# EAGLE board Relay_Cape (EAGLE 7.7.0)
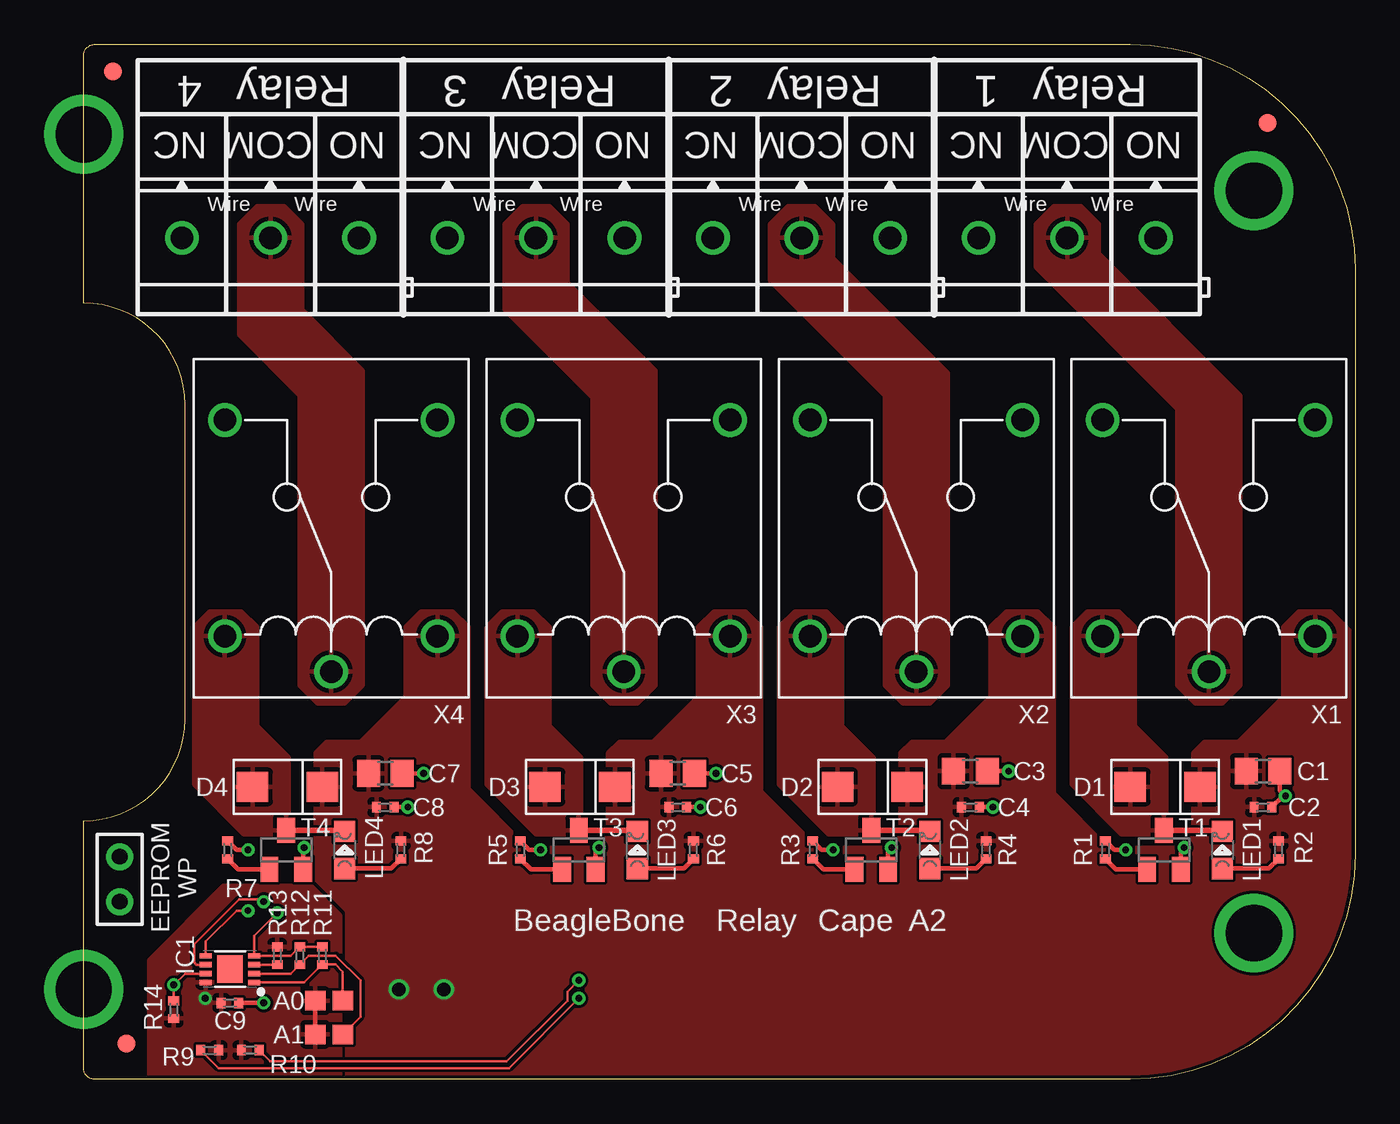
[diagram p0: board, top side]
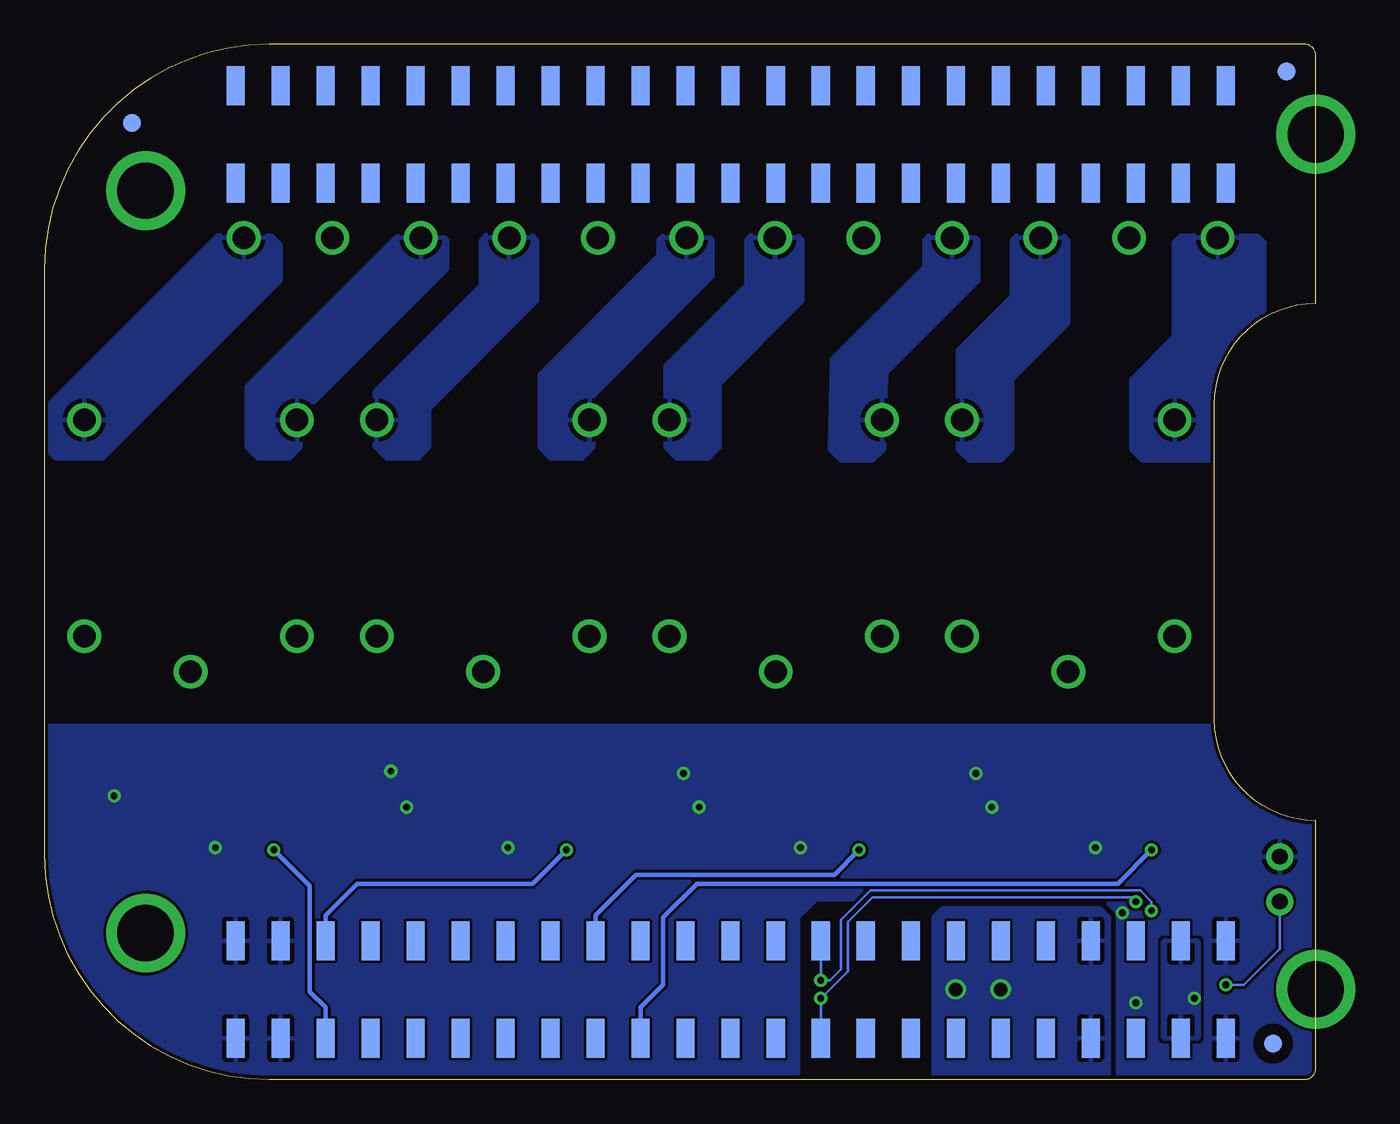
[diagram p1: board, bottom side, seen from below]

Size 71.75 x 58.42 mm. Coordinates in mm from the lower left corner, seen from the top.
Copper layers (1+16): Top 0.035mm / dielectric 1.5mm / Bottom 0.035mm
Design rules "SparkFun-2-layer *": minimum track width 6mil, minimum drill 15mil, track to track 6mil, track to pad 6mil, pad to pad 6mil, via to via 6mil, smd to smd 6mil, copper to edge 8mil, drill to drill 8mil, minimum pad ring 12mil, minimum via ring 7mil, stop-mask expansion 4mil, vias tented up to drill 32mil, thermal gap 10mil
tRestrict: 4 lines

## Footprints (pad centres in the part's own frame; a part is rotated, then mirrored left to right if it is on the bottom)
BEAGLEBONE.CAPE.BOTTOM-ONLY-PADS = smd 1.02 x 2.2 bottom: B8.1 5.08,50.59; B8.2 5.08,56.09; B8.3 7.62,50.59; B8.4 7.62,56.09; B8.5 10.16,50.59; B8.6 10.16,56.09; B8.7 12.7,50.59; B8.8 12.7,56.09; B8.9 15.24,50.59; B8.10 15.24,56.09; B8.11 17.78,50.59; B8.12 17.78,56.09; B8.13 20.32,50.59; B8.14 20.32,56.09; B8.15 22.86,50.59; B8.16 22.86,56.09; B8.17 25.4,50.59; B8.18 25.4,56.09; B8.19 27.94,50.59; B8.20 27.94,56.09; B8.21 30.48,50.59; B8.22 30.48,56.09; B8.23 33.02,50.59; B8.24 33.02,56.09; B8.25 35.56,50.59; B8.26 35.56,56.09; B8.27 38.1,50.59; B8.28 38.1,56.09; B8.29 40.64,50.59; B8.30 40.64,56.09; B8.31 43.18,50.59; B8.32 43.18,56.09; B8.33 45.72,50.59; B8.34 45.72,56.09; B8.35 48.26,50.59; B8.36 48.26,56.09; B8.37 50.8,50.59; B8.38 50.8,56.09; B8.39 53.34,50.59; B8.40 53.34,56.09; B8.41 55.88,50.59; B8.42 55.88,56.09; B8.43 58.42,50.59; B8.44 58.42,56.09; B8.45 60.96,50.59; B8.46 60.96,56.09; B9.1 5.08,2.33; B9.2 5.08,7.83; B9.3 7.62,2.33; B9.4 7.62,7.83; B9.5 10.16,2.33; B9.6 10.16,7.83; B9.7 12.7,2.33; B9.8 12.7,7.83; B9.9 15.24,2.33; B9.10 15.24,7.83; B9.11 17.78,2.33; B9.12 17.78,7.83; B9.13 20.32,2.33; B9.14 20.32,7.83; B9.15 22.86,2.33; B9.16 22.86,7.83; B9.17 25.4,2.33; B9.18 25.4,7.83; B9.19 27.94,2.33; B9.20 27.94,7.83; B9.21 30.48,2.33; B9.22 30.48,7.83; B9.23 33.02,2.33; B9.24 33.02,7.83; B9.25 35.56,2.33; B9.26 35.56,7.83; B9.27 38.1,2.33; B9.28 38.1,7.83; B9.29 40.64,2.33; B9.30 40.64,7.83; B9.31 43.18,2.33; B9.32 43.18,7.83; B9.33 45.72,2.33; B9.34 45.72,7.83; B9.35 48.26,2.33; B9.36 48.26,7.83; B9.37 50.8,2.33; B9.38 50.8,7.83; B9.39 53.34,2.33; B9.40 53.34,7.83; B9.41 55.88,2.33; B9.42 55.88,7.83; B9.43 58.42,2.33; B9.44 58.42,7.83; B9.45 60.96,2.33; B9.46 60.96,7.83 | drill 3.175 pad 4.445: MH.1 0,5.08; MH.2 66.04,8.255; MH.3 66.04,50.165; MH.4 0,53.34
0805 = smd 1.3 x 1.5: 1 -0.95,0; 2 0.95,0
0402 = smd 0.5 x 0.6: 1 -0.5,0; 2 0.5,0
DIODE_SMA = smd 1.778 x 1.676: A -1.905,0; K 2.032,0
FIDUCIAL_40MIL = smd 1.016 x 1.016: P$1 0,0
UDFN8,2X3(ON-SEMI) = smd 0.3 x 0.68: 1 0.75,1.36; 2 0.25,1.36; 3 -0.25,1.36; 4 -0.75,1.36; 5 -0.75,-1.36; 6 -0.25,-1.36; 7 0.25,-1.36; 8 0.75,-1.36 | smd 1.56 x 1.45: P$1 0,0
JUMPER-(X2) = drill 0.889 pad 1.524: 1 -1.27,0; 2 1.27,0
0805-LED = smd 1.2 x 1.2: A 0,1.05; K 0,-1.05
SOLDER.JOINT(0603) = smd 1.15 x 1.1: 1 -0.775,0; 2 0.775,0
SOT23-BEC = smd 1 x 1.4: B -0.95,-1.1; C 0,1.1; E 0.95,-1.1
GOODSKY.RWH-SH-105D = drill 1.27: COM 0,8.1; NC 6,-6.1; NO -6,-6.1; V+ -6,6.1; V- 6,6.1
TERMINAL.BLOCK-3TERM-5MM.PITCH-(50MIL.HOLES) = drill 1.27 pad 1.778: 1 -5,0; 2 0,0; 3 5,0

## Placement (x,y rotation side)
BB.CAPE1  BEAGLEBONE.CAPE.BOTTOM-ONLY-PADS  [BEAGLEBONE.CAPE.BOTTOM-ONLY-PADS]  0,0 0 top
C1  10uF  [0805]  66.55,17.4 0 top
C2  .1uF  [0402]  66.55,15.37 0 top
C3  10uF  [0805]  50.04,17.4 0 top
C4  .1uF  [0402]  50.04,15.37 0 top
C5  10uF  [0805]  33.53,17.27 0 top
C6  .1uF  [0402]  33.53,15.37 0 top
C7  10uF  [0805]  17.02,17.27 0 top
C8  .1uF  [0402]  17.02,15.37 0 top
C9  .1uF  [0402]  8.26,4.32 0 top
D1  B260  [DIODE_SMA]  60.96,16.51 0 top
D2  B260  [DIODE_SMA]  44.45,16.51 0 top
D3  B260  [DIODE_SMA]  27.94,16.51 0 top
D4  B260  [DIODE_SMA]  11.43,16.51 0 top
FUD1  FIDUCIAL  [FIDUCIAL_40MIL]  2.41,2.03 0 top
FUD2  FIDUCIAL  [FIDUCIAL_40MIL]  66.8,53.98 0 top
FUD3  FIDUCIAL  [FIDUCIAL_40MIL]  1.65,56.9 0 top
FUD4  FIDUCIAL  [FIDUCIAL_40MIL]  2.41,2.03 0 bottom
FUD5  FIDUCIAL  [FIDUCIAL_40MIL]  66.8,53.98 0 bottom
FUD6  FIDUCIAL  [FIDUCIAL_40MIL]  1.65,56.9 0 bottom
IC1  [UDFN8,2X3(ON-SEMI)]  8.26,6.22 270 top
JMP1  JUMPER-(X2)  [JUMPER-(X2)]  2.03,11.3 90 top
LED1  GREEN  [0805-LED]  64.26,12.95 180 top
LED2  GREEN  [0805-LED]  47.75,12.95 180 top
LED3  GREEN  [0805-LED]  31.24,12.95 180 top
LED4  GREEN  [0805-LED]  14.73,12.95 180 top
R1  1k  [0402]  57.66,12.95 270 top
R2  1k  [0402]  67.44,12.95 90 top
R3  1k  [0402]  41.15,12.95 270 top
R4  1k  [0402]  50.93,12.95 90 top
R5  1k  [0402]  24.64,12.95 270 top
R6  1k  [0402]  34.42,12.95 90 top
R7  1k  [0402]  8.13,12.95 270 top
R8  1k  [0402]  17.91,12.95 90 top
R9  DNP(2.2k)  [0402]  7.11,1.65 0 top
R10  DNP(2.2k)  [0402]  9.4,1.65 180 top
R11  1k  [0402]  13.46,6.99 270 top
R12  1k  [0402]  12.19,6.99 270 top
R13  1k  [0402]  10.92,6.99 270 top
R14  1k  [0402]  5.08,3.94 270 top
SJ1  [SOLDER.JOINT(0603)]  13.84,4.45 0 top
SJ2  [SOLDER.JOINT(0603)]  13.84,2.54 0 top
T1  3904  [SOT23-BEC]  60.96,12.95 0 top
T2  3904  [SOT23-BEC]  44.45,12.95 0 top
T3  3904  [SOT23-BEC]  27.94,12.95 0 top
T4  3904  [SOT23-BEC]  11.43,12.95 0 top
X1  RELAY_SINGLE_POLE_DOUBLE_THROW  [GOODSKY.RWH-SH-105D]  63.5,31.11 180 top
X2  RELAY_SINGLE_POLE_DOUBLE_THROW  [GOODSKY.RWH-SH-105D]  46.99,31.11 180 top
X3  RELAY_SINGLE_POLE_DOUBLE_THROW  [GOODSKY.RWH-SH-105D]  30.48,31.11 180 top
X4  RELAY_SINGLE_POLE_DOUBLE_THROW  [GOODSKY.RWH-SH-105D]  13.97,31.11 180 top
X5  [TERMINAL.BLOCK-3TERM-5MM.PITCH-(50MIL.HOLES)]  55.5,47.5 0 top
X6  [TERMINAL.BLOCK-3TERM-5MM.PITCH-(50MIL.HOLES)]  40.51,47.5 0 top
X7  [TERMINAL.BLOCK-3TERM-5MM.PITCH-(50MIL.HOLES)]  25.53,47.5 0 top
X8  [TERMINAL.BLOCK-3TERM-5MM.PITCH-(50MIL.HOLES)]  10.54,47.5 0 top

## Library data of the parts
BB.CAPE1 = GHI-Solutions
C1-C9 LED1-LED4 R1-R14 = GHI-BasicComponents
D1-D4 FUD1-FUD6 = GHI
IC1 = GHI-IC
JMP1 = GHI-Headers
SJ1 SJ2 = GHI-Miscellaneous
T1-T4 = transistor
X1-X4 = GHI2
X5-X8 = GHI-Connectors

## Nets
+5V: BB.CAPE1.B9.7 BB.CAPE1.B9.8 C1.1 C2.1 C3.1 C4.1 C5.1 C6.1 C7.1 C8.1 D1.K D2.K D3.K D4.K R2.2 R4.2 R6.2 R8.2 X1.V+ X2.V+ X3.V+ X4.V+
A0: IC1.1 R11.2 SJ1.2
A1: IC1.2 R12.2 SJ2.2
A2: IC1.3 R13.2
GND: BB.CAPE1.B9.1 BB.CAPE1.B9.2 BB.CAPE1.B9.43 BB.CAPE1.B9.44 BB.CAPE1.B9.45 BB.CAPE1.B9.46 C1.2 C2.2 C3.2 C4.2 C5.2 C6.2 C7.2 C8.2 C9.2 IC1.4 JMP1.2 R11.1 R12.1 T1.E T2.E T3.E T4.E
LED1.A: LED4.A R8.1
LED2.A: LED3.A R6.1
LED3.A: LED2.A R4.1
LED4.A: LED1.A R2.1
RELAY1: BB.CAPE1.B9.41 R1.1
RELAY1.COM.GND: X1.COM X5.2
RELAY1.GND: D4.A LED4.K T4.C X4.V-
RELAY1.NC: X1.NC X5.1
RELAY1.NO: X1.NO X5.3
RELAY2: BB.CAPE1.B9.42 R3.1
RELAY2.COM.GND: X2.COM X6.2
RELAY2.GND: D3.A LED3.K T3.C X3.V-
RELAY2.NC: X2.NC X6.1
RELAY2.NO: X2.NO X6.3
RELAY3: BB.CAPE1.B9.30 R5.1
RELAY3.COM.GND: X3.COM X7.2
RELAY3.GND: D2.A LED2.K T2.C X2.V-
RELAY3.NC: X3.NC X7.1
RELAY3.NO: X3.NO X7.3
RELAY4: BB.CAPE1.B9.27 R7.1
RELAY4.COM.GND: X4.COM X8.2
RELAY4.GND: D1.A LED1.K T1.C X1.V-
RELAY4.NC: X4.NC X8.1
RELAY4.NO: X4.NO X8.3
SCL: BB.CAPE1.B9.19 IC1.6 R9.1
SDA: BB.CAPE1.B9.20 IC1.5 R10.1
T1.BASE: R7.2 T4.B
T2.BASE: R5.2 T3.B
T3.BASE: R3.2 T2.B
T4.BASE: R1.2 T1.B
VCC: BB.CAPE1.B9.3 BB.CAPE1.B9.4 C9.1 IC1.8 R9.2 R10.2 R13.1 R14.2 SJ1.1 SJ2.1
WP: IC1.7 JMP1.1 R14.1

## Tracks (layer width: path | path; a pad name or v marks a point on that pad's centre or on a via)
+5V  (via drill 0.76 pad 0.18)
  other vias: 20.32,5.08 17.78,5.08
  pour Bottom: 11.68,9.14 11.68,0 12.06,-0.38 21.59,-0.38 21.59,9.14 21.08,9.65 12.19,9.65
  pour Top (rank 2): 13.08,-0.64 72.39,-0.64 72.39,24.38 70.36,26.42 68.58,26.42 67.69,25.53 67.69,21.59 65.15,19.05 63.25,19.05 62.61,18.41 62.61,13.72 61.98,13.08 57.78,13.08 54.74,16.13 54.74,25.53 53.85,26.42 52.07,26.42 51.18,25.53 51.18,21.59 48.64,19.05 46.74,19.05 46.1,18.41 46.1,13.72 45.47,13.08 41.4,13.08 38.23,16.26 38.23,25.53 37.34,26.42 35.56,26.42 34.67,25.53 34.67,21.59 32.13,19.05 30.23,19.05 29.59,18.41 29.59,13.72 28.96,13.08 25.02,13.08 21.72,16.38 21.72,25.53 20.83,26.42 19.05,26.42 18.16,25.53 18.16,21.59 15.62,19.05 13.72,19.05 13.08,18.41
A0
  Top 0.152: IC1.1 12.45,5.47 R11.2 14.22,6.49 14.62,6.08 SJ1.2
A1
  Top 0.152: IC1.2 11.68,5.97 R12.2 12.69,6.99 14.22,6.99 15.62,5.59 15.62,3.54 SJ2.2
A2
  Top 0.152: IC1.3 10.91,6.47 R13.2
GND  (via drill 0.38 pad 0.18)
  Top 0.152: v10.92,9.4 9.62,8.09 IC1.4 11.68,6.97 R12.1 R11.1
  Top 0.254: C9.2 v10.16,4.32 10.29,4.45 | C8.2 v18.29,15.37 | C7.2 v19.18,17.27 | C6.2 v34.8,15.37 | C5.2 v35.69,17.27 | C3.2 v52.2,17.4 | C4.2 v51.31,15.37 | C1.2 67.5,16.32 v67.82,16 67.68,16 C2.2 | T4.E 12.38,13.02 v12.45,13.08 | T3.E 28.89,12.89 v29.08,13.08 | T2.E 45.4,12.89 v45.59,13.08 | T1.E 61.91,12.89 v62.1,13.08
  pour Bottom (rank 2): -0.38,-0.38 11.18,-0.38 11.18,9.4 11.94,10.16 28.19,10.16 29.21,9.14 29.21,0 29.59,-0.38 72.14,-0.38 72.14,19.94 -0.38,19.94
LED1.A
  Top 0.254: LED4.A 17.36,11.9 R8.1
LED2.A
  Top 0.254: LED3.A 33.87,11.9 R6.1
LED3.A
  Top 0.254: LED2.A 50.38,11.9 R4.1
LED4.A
  Top 0.254: LED1.A 66.89,11.9 R2.1
RELAY1  (via drill 0.38 pad 0.18)
  Top 0.254: v58.8,12.95 58.16,12.95 R1.1
  Bottom 0.254: v58.8,12.95 56.77,10.92 56.77,4.95 55.88,4.06 BB.CAPE1.B9.41
RELAY1.COM.GND
  pour Top: 62.74,21.21 64.26,21.21 65.28,22.23 65.28,38.61 57.28,46.61 57.28,48.26 56.26,49.28 54.74,49.28 53.72,48.26 53.72,45.85 61.72,37.85 61.72,22.23
RELAY1.GND
  Top 0.305: T4.C 14.68,14.05 LED4.K
  pour Top: 11.56,13.84 11.56,18.16 9.78,19.94 9.78,25.53 8.89,26.42 7.11,26.42 6.22,25.53 6.22,16.64 9.02,13.84
RELAY1.NC
  pour Bottom: 60.33,39.12 60.33,35.69 59.69,35.05 57.91,35.05 57.28,35.69 57.28,37.47 49.02,45.72 49.02,47.37 49.4,47.75 51.69,47.75
RELAY1.NO
  pour Bottom: 71.12,35.05 68.45,35.05 58.42,45.09 58.42,47.12 58.93,47.62 61.98,47.62 71.75,37.85 71.75,35.69
RELAY2  (via drill 0.38 pad 0.18)
  Top 0.254: v42.29,12.95 41.65,12.95 R3.1
  Bottom 0.254: v42.29,12.95 44.2,11.05 54.1,11.05 55.88,9.27 BB.CAPE1.B9.42
RELAY2.COM.GND
  pour Top: 46.23,21.21 47.75,21.21 48.77,22.23 48.77,39.88 42.29,46.35 42.29,48.26 41.27,49.28 39.75,49.28 38.73,48.26 38.73,45.09 45.21,38.61 45.21,22.23
RELAY2.GND
  Top 0.305: T3.C 31.19,14.05 LED3.K
  pour Top: 28.07,13.84 28.07,18.16 26.29,19.94 26.29,25.53 25.4,26.42 23.62,26.42 22.73,25.53 22.73,16.64 25.53,13.84
RELAY2.NC
  pour Bottom: 43.81,39.75 43.81,35.69 43.18,35.05 41.4,35.05 40.77,35.69 40.77,38.61 34.04,45.34 34.04,47.37 34.42,47.75 36.7,47.75 37.08,47.37 37.08,46.48
RELAY2.NO
  pour Bottom: 53.09,38.86 53.09,35.69 52.45,35.05 50.67,35.05 50.04,35.69 50.04,37.85 43.94,43.94 43.94,47.37 44.32,47.75 46.74,47.75 47.12,47.37 47.12,44.83
RELAY3  (via drill 0.38 pad 0.18)
  Top 0.254: v25.78,12.95 25.14,12.95 R5.1
  Bottom 0.254: v25.78,12.95 27.18,11.56 38.35,11.56 40.64,9.27 BB.CAPE1.B9.30
RELAY3.COM.GND
  pour Top: 29.72,21.21 31.24,21.21 32.26,22.23 32.26,40.01 27.3,44.96 27.3,48.26 26.29,49.28 24.77,49.28 23.75,48.26 23.75,43.43 28.7,38.48 28.7,22.23
RELAY3.GND
  Top 0.305: T2.C 47.7,14.05 LED2.K
  pour Top: 44.58,13.84 44.58,18.16 42.8,19.94 42.8,25.53 41.91,26.42 40.13,26.42 39.24,25.53 39.24,16.64 42.04,13.84
RELAY3.NC
  pour Bottom: 27.3,40.64 27.43,35.56 26.8,34.92 25.02,34.92 24.38,35.56 24.26,39.88 19.05,45.09 19.05,47.37 19.43,47.75 21.72,47.75 22.1,47.37 22.1,45.85
RELAY3.NO
  pour Bottom: 36.7,40.26 36.7,35.69 36.07,35.05 34.29,35.05 33.66,35.69 33.66,39.24 28.96,43.94 28.96,47.37 29.34,47.75 31.75,47.75 32.13,47.37 32.13,44.83
RELAY4  (via drill 0.38 pad 0.18)
  Top 0.254: v9.27,12.95 8.63,12.95 R7.1
  Bottom 0.254: v9.27,12.95 11.18,11.05 34.92,11.05 36.83,9.14 36.83,5.33 38.1,4.06 BB.CAPE1.B9.27
RELAY4.COM.GND
  pour Top: 13.21,21.21 14.73,21.21 15.75,22.23 15.75,40.01 12.32,43.43 12.32,48.26 11.3,49.28 9.78,49.28 8.76,48.26 8.76,42.04 12.19,38.61 12.19,22.23
RELAY4.GND
  Top 0.305: T1.C 64.21,14.05 LED1.K
  pour Top: 61.09,13.84 61.09,18.16 59.31,19.94 59.31,25.53 58.42,26.42 56.64,26.42 55.75,25.53 55.75,16.64 58.55,13.84
RELAY4.NC
  pour Bottom: 2.92,47.24 2.92,34.92 9.78,34.92 10.41,35.56 10.41,39.5 8,41.91 8,47.24 7.62,47.62 3.3,47.62
RELAY4.NO
  pour Bottom: 20.19,41.15 20.19,35.56 19.56,34.92 17.78,34.92 17.14,35.56 17.14,39.5 13.97,42.67 13.97,47.37 14.35,47.75 16.76,47.75 17.14,47.37 17.14,44.2
SCL  (via drill 0.38 pad 0.18)
  Top 0.152: R9.1 7.63,0.64 24,0.64 v27.94,4.57 | IC1.6 6.35,6.47 6.22,6.6 6.22,7.62 8.76,10.16 10.03,10.16 v10.16,10.03
  Bottom 0.152: v10.16,10.03 10.41,10.29 25.02,10.29 26.42,8.89 26.42,6.1 v27.94,4.57 BB.CAPE1.B9.19
SDA  (via drill 0.38 pad 0.18)
  Top 0.152: R10.1 10.53,1.02 23.88,1.02 27.3,4.45 27.3,4.95 v27.94,5.59 | IC1.5 6.89,7.78 8.64,9.53 v9.27,9.53
  Bottom 0.152: v9.27,9.53 9.27,10.03 9.91,10.67 25.15,10.67 26.8,9.02 26.8,6.22 27.43,5.59 v27.94,5.59 BB.CAPE1.B9.20
T1.BASE
  Top 0.254: T4.B 8.73,11.85 R7.2
T2.BASE
  Top 0.254: T3.B 25.24,11.85 R5.2
T3.BASE
  Top 0.254: T2.B 41.75,11.85 R3.2
T4.BASE
  Top 0.254: T1.B 58.26,11.85 R1.2
VCC  (via drill 0.38 pad 0.18)
  Top 0.254: SJ2.1 SJ1.1
  other vias: 6.86,4.57
  pour Bottom: 6.99,2.03 8.26,2.03 8.64,2.41 8.64,7.75 8.13,8.26 7.11,8.26 6.6,7.75 6.6,2.41
  pour Top: 14.48,-0.64 14.48,9.27 12.83,10.92 7.87,10.92 3.68,6.73 3.68,-0.64
WP  (via drill 0.38 pad 0.18)
  Top 0.152: IC1.7 5.72,5.97 v5.08,5.33 R14.1
  Bottom 0.152: v5.08,5.33 4.06,5.33 2.03,7.37 JMP1.1

## Text on the board
tPlace: 4 | Relay | 3 | Relay | 2 | Relay | 1 | Relay | NC | COM | NO | NC | COM | NO | NC | COM | NO | NC | COM | NO | EEPROM / WP | BeagleBone | Relay | Cape | A2 | A0 | A1